# Altium PCB ColorSS_PCB.PcbDoc
Units mm, origin at the board's own origin, x right, y up, seen from the top; angles counter-clockwise.
Board outline 18.5 x 30 mm, 2 copper layers (Top Layer, Bottom Layer), stack 1.571 mm thick; 18 components, 14 nets, 52 pads, 7 vias.
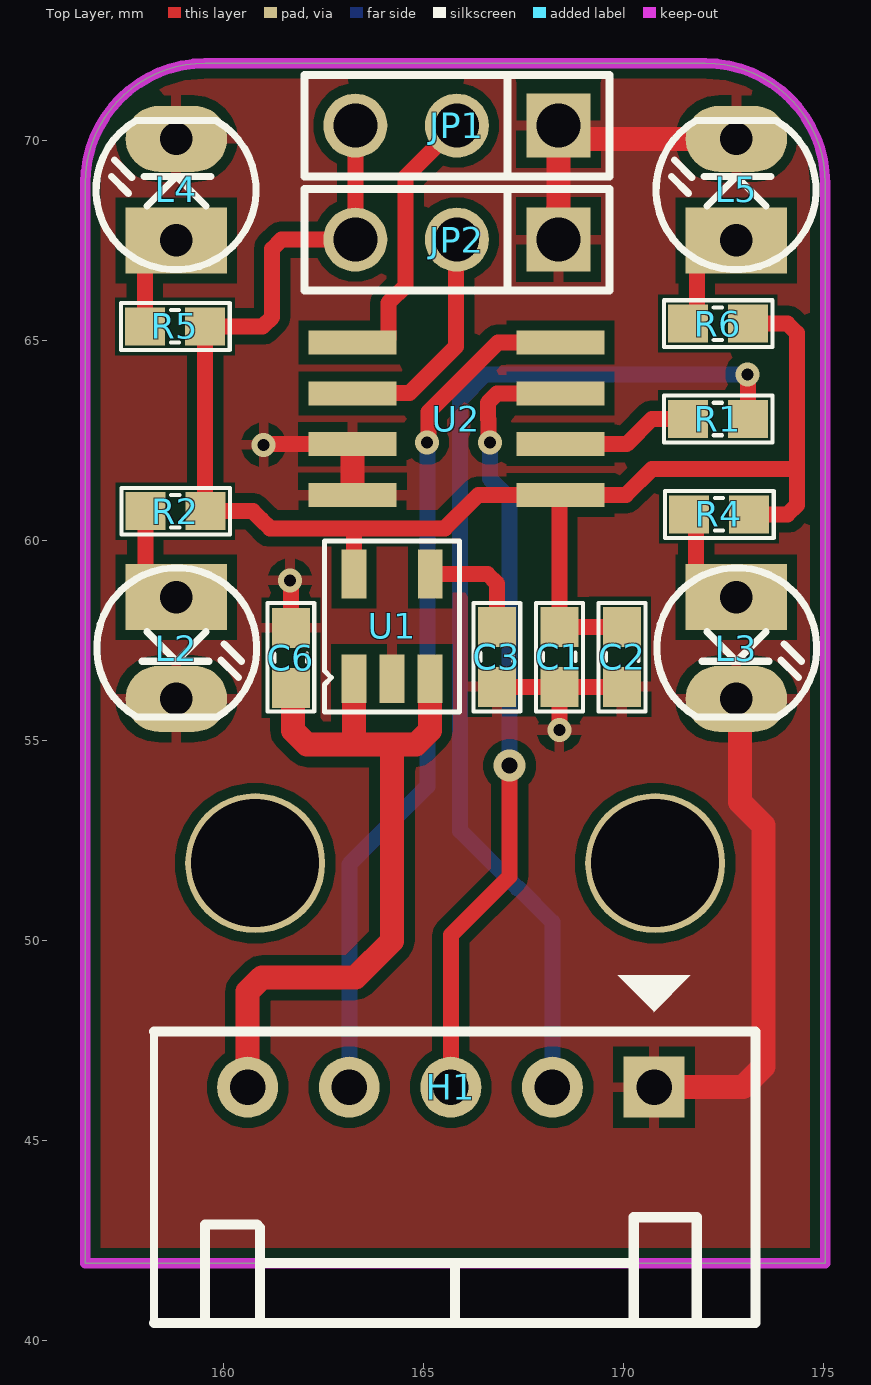
[diagram p0: Top Layer view]
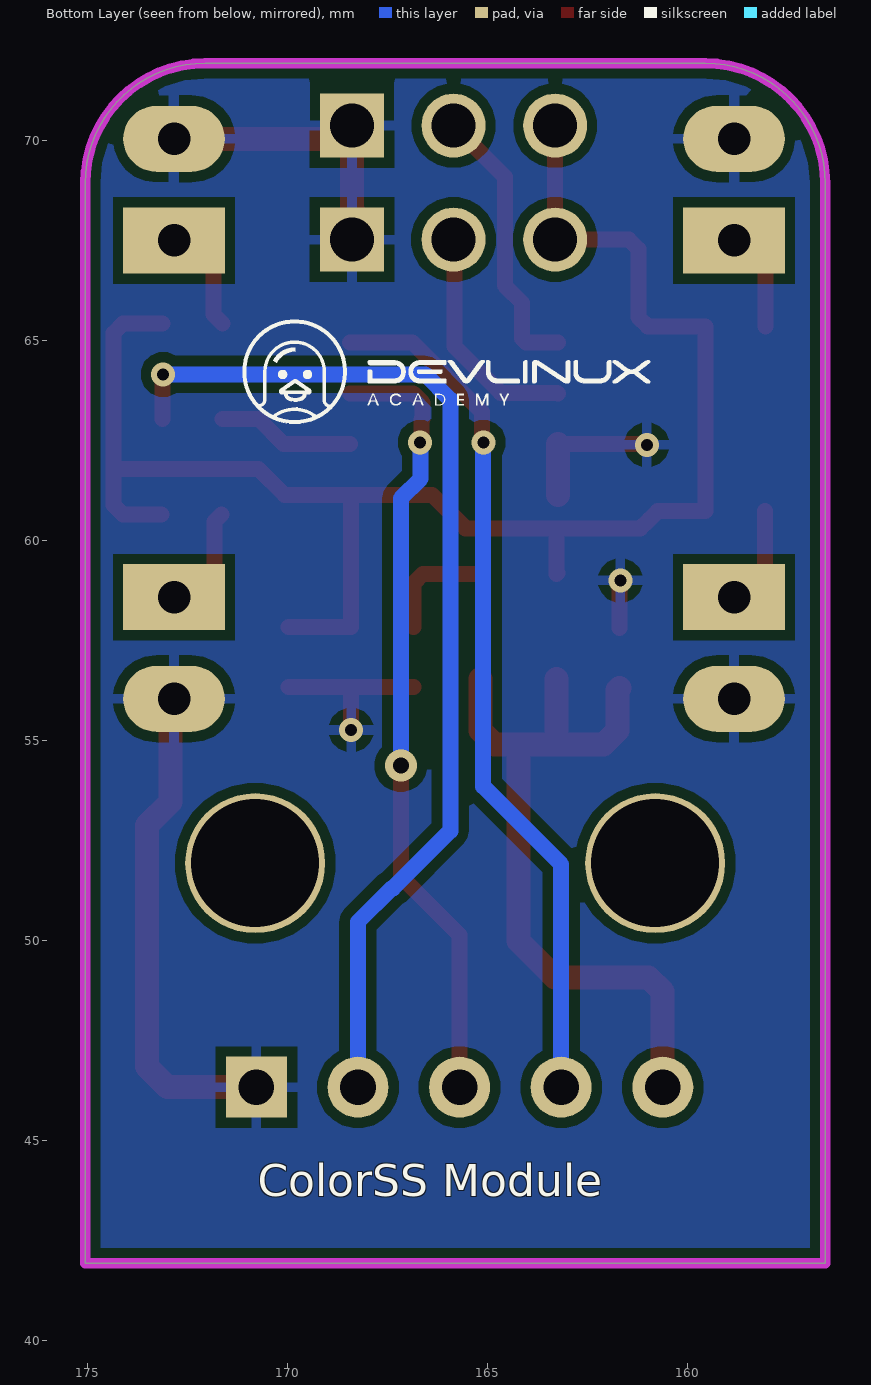
[diagram p1: Bottom Layer view, seen from below]
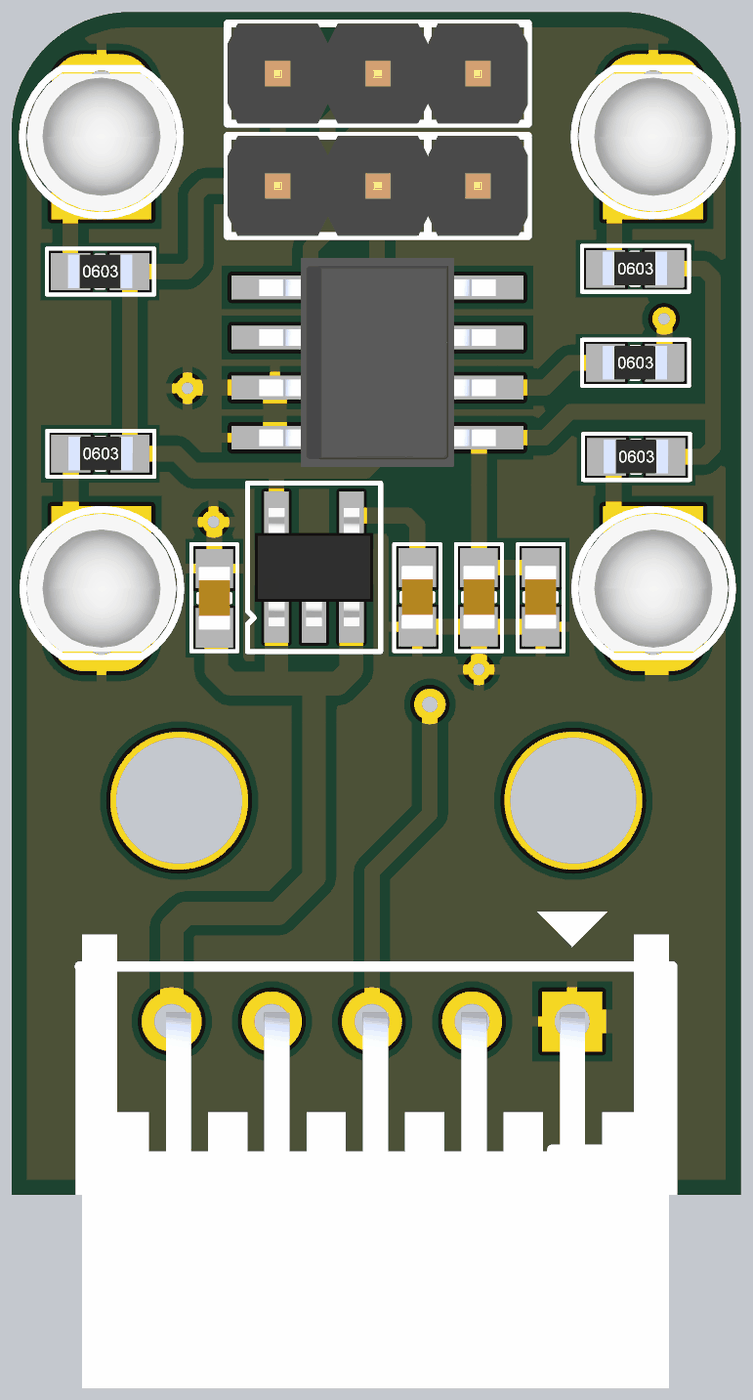
[diagram p2: 3D render of the assembled board from above, using the file's embedded part models]

## Layer stack, top to bottom
Top Solder: solder mask 0.0102, Solder Resist, Dk 3.5
Top Layer: signal copper 0.0356
Dielectric 1: dielectric 1.5, FR-4, Dk 4.8
Bottom Layer: signal copper 0.0356
Bottom Solder: solder mask 0.0102, Solder Resist, Dk 3.5

## Board outline
156.549,41.93 156.549,68.93 cw(c159.549,68.93) 159.549,71.93 172.049,71.93 cw(c172.049,68.93) 175.049,68.93 175.049,41.93

## Design rules (kind name [scope] priority, off if disabled: settings)
Clearance [All] p1: gap=0.254 ignorepadtopadclearanceinfootprint=FALSE except(0: Arc-Hole Track-Hole SMDPad-Hole THPad-Hole Via-Hole Fill-Hole Poly-Hole Region-Hole Text-Hole; 0.178: Arc-Arc Arc-Track Arc-SMDPad Arc-THPad Track-Track Track-SMDPad Track-THPad SMDPad-SMDPad SMDPad-THPad THPad-THPad)
PolygonConnect [All] p1: connectstyle=Relief reliefconductorwidth=0.254 reliefentries=4 polygonreliefangle="90 Angle" airgapwidth=0.254
RoomDefinition ColorSS_SCH [InComponentClass('ColorSS_SCH')] p1: confinementstyle=ConfineIn formatcopy=TRUE lockcomponents=FALSE outline 178.943,26.924 259.715,26.924 259.715,45.085 178.943,45.085
RoutingVias [All] p1: holewidth=0.4 width=0.8 viastyle="Through Hole" minholewidth=0.3 minwidth=0.6 maxholewidth=0.5 maxwidth=1
SolderMaskExpansion [All] p1: expansion=0.102 istentingtop=FALSE
Width [All] p1: maxlimit=0.6 minlimit=0.254 preferedwidth=0.4
30 further rules are at their usual default settings.

## Components (designator, comment, footprint, x,y, rotation, side; value= is the part's Value field where it differs from the comment)
C1 "10uF" "tu 0603" 168.405,57.09 r270 top
C2 "100nF" "tu 0603" 169.97,57.09 r270 top
C3 "22nF" "tu 0603" 166.84,57.09 r270 top
C6 "100nF" "tu 0603" 161.69,57.065 r90 top
H1 "Header 5P 2.54 Duc Cong" "Header 5P DC 2.54" 170.77,46.33 r270 top
JP1 "JP 1x3 2.54" "JP 1x3 DT" 168.38,70.37 r180 top
JP2 "JP 1x3 2.54" "JP 1x3 DT" 168.38,67.52 r180 top
L2 "LED 3mm" LED-3MM-WHITE 158.829,58.58 r270 top
L3 "LED 3mm" LED-3MM-WHITE 172.829,58.58 r270 top
L4 "LED 3mm" LED-3MM-WHITE 158.829,67.5 r90 top
L5 "LED 3mm" LED-3MM-WHITE 172.829,67.5 r90 top
R1 "1k" "tro smd 0603" 172.365,63.035 r0 top
R2 "330R" "tro smd 0603" 158.8,60.73 r0 top
R4 "330R" "tro smd 0603" 172.39,60.65 r0 top
R5 "330R" "tro smd 0603" 158.79,65.35 r0 top
R6 "330R" "tro smd 0603" 172.365,65.42 r0 top
U1 "RT9193-33GB" SOT23-5 164.22,57.85 r0 top
U2 "TCS3200D" SOIC8 165.829,63.04 r0 top

## Footprints (in the part's own frame and the unit in brackets; to place one, negate y for a bottom-side part, rotate by r counter-clockwise, add the part's x,y. Pads: shape width x height; smd on the part's side, far side on the other; paste and mask are expansions set on the pad)
"Header 5P DC 2.54" [mil]
  rect 60x60 hole 35: 1(0,0)
  round 60 hole 35: 2(0,-100) 3(0,-200) 4(0,-300) 5(0,-400)
  silkscreen extent -110,-492 232,100, body extent -87,-490 366,97, height 240
"JP 1x3 DT" [mm]
  rect 1.6x1.6 hole 1.1: 1(0,0)
  round 1.6 hole 1.1: 2(2.54,0) 3(5.08,0)
  silkscreen extent -1.27,-1.27 6.35,1.27, body extent -1.27,-1.27 6.35,1.27, height 8.54
LED-3MM-WHITE [mil] "LED 2 PIN, 3ly Only colour"
  rect 65x100 hole 32: 1(0,0)
  oval 65x100 hole 32: 2(100,0)
  silkscreen extent -29,-78 118,79, body extent -25,-75 113,75, height 217
SOIC8 [mm]
  rect 2.2x0.6 smd: 1(-2.6,1.905) 2(-2.6,0.635) 3(-2.6,-0.635) 4(-2.6,-1.905) 5(2.6,-1.905) 6(2.6,-0.635) 7(2.6,0.635) 8(2.6,1.905)
  body extent -3,-2.65 3,2.65, height 1.75
SOT23-5 [mm] "CASE: SOT"
  rect 0.62x1.22 smd mask+0.076: 1(-0.953,-1.31) 2(-0.003,-1.31) 3(0.947,-1.31) 4(0.952,1.31) 5(-0.953,1.31)
  silkscreen extent -1.69,-2.14 1.69,2.14, body extent -1.5,-1.5 1.5,1.5, height 1.41
"tro smd 0603" [mm] "Chip Capacitor, 2-Leads, Body 1,60x0,80mm, IPC Medium Density"
  rect 1x0.95 smd mask+0.076: 1(-0.75,0) 2(0.75,0)
  silkscreen extent -1.35,-0.58 1.37,0.58, body extent -0.82,-0.42 0.82,0.43, height 0.44
"tu 0603" [mm] "Chip Capacitor, 2-Leads, Body 1,60x0,80mm, IPC Medium Density"
  rect 1x0.95 smd mask+0.076: 1(-0.75,0) 2(0.75,0)
  silkscreen extent -1.35,-0.58 1.37,0.58, body extent -0.8,-0.4 0.8,0.4, height 0.9

## Part data
C1: library part "Tu 0603 106 16V 20%", "Dán", Chung_Loai=Dán, Don_Vi=Con, Ma_Hang=MH004848, So_Chan=2, Ten_Linh_Kien="Tụ 0603-10uF 20% 16V"
C2 C3 C6: library part "Tu 0603 104 50V 10%", "Dán", Chung_Loai=Dán, Don_Vi=Con, Ma_Hang=MH004568, So_Chan=2, Ten_Linh_Kien="Tụ 0603 104-100nF 10% 50V"
H1: "Cắm", Chung_Loai=Cắm, Don_Vi=Con, Ma_Hang=MH001308, Ten_Linh_Kien="Header 5P XH2.54-5P Đực Cong"
JP1 JP2: library part "JP 1x3 2.54 Duc Thang", "Cắm", Chung_Loai=Cắm, Don_Vi=Con, Ma_Hang=MH000903, Ten_Linh_Kien="Jump Đơn Đực 2.54MM 1x40P Thẳng 11MM"
L2 L3 L4 L5: library part "LED 3mm Trang", "Cắm", Chung_Loai=Cắm, Don_Vi=Con, Ma_Hang=MH009001, Ten_Linh_Kien="LED 3MM Trắng SS (1000c)"
R1: library part "Tro 0603 1% 1k", "Dán", Chung_Loai=Dán, Don_Vi=Con, Ma_Hang=MH006334, So_Chan=2, Ten_Linh_Kien="Trở 0603 1% 1k"
R2 R4 R5 R6: library part "Tro 0603 5% 330R", "Dán", Chung_Loai=Dán, Don_Vi=Con, Ma_Hang=MH006910, So_Chan=2, Ten_Linh_Kien="Trở 0603 5% 330R"
U1: library part REG_5.5V-3.3V-0.3A-1W-SOT-23-5, "Linear Voltage Regulator IC 1 Output 300mA SOT-23-5", Alternate Part Number-1=NA, Case/Package=SOT-23-5, Manufacturer="Richtek USA Inc.", Supplier Part Number-1=C15651, Manufacturer Part Number=RT9193-33GB, Supplier-1=LCSC
U2: "Color Sensor - Auto Power Down 8-SOIC (0.154, 3.90mm Width)", Package="SOIC-8 ams", Check_prices=https://www.snapeda.com/parts/TCS3200D/ams/view-part/?ref=eda, MF=ams, MP=TCS3200D, SnapEDA_Link=https://www.snapeda.com/parts/TCS3200D/ams/view-part/?ref=snap

## Free pads (board coordinates)
  round 3.5 hole 3.2: 5(160.799,51.93) 5(170.799,51.93)

## Via types
v1: diameter 0.6, hole 0.3, Top Layer to Bottom Layer, 6 vias
v2: diameter 0.8, hole 0.4, Top Layer to Bottom Layer, 1 vias

## Nets (pads, with @x,y where several pads share a name; then routed paths per layer and width w, separated by ;. In a path a pad name is that pad's centre, name@x,y a point inside that pad or via, vN(x,y) a via of type N, cw(c..) or ccw(c..) an arc to the next point about the centre after c; other vN are vias at no path point)
+3V3: C1.1 C2.1 JP1.3 JP2.3 R2.2 R4.2 R5.2 R6.2 U1.5 U2.5 | length 41.9
  Top Layer w0.4: U1.5@163.24,59.187 U1.5 163.267,60.212 163.355,60.3 ; JP2.3 161.454,67.52 161.22,67.286 161.22,65.584 160.986,65.35 R5.2 159.545,65.345 159.545,60.735 R2.2 160.74,60.73 160.951,60.519 161.17,60.3 163.355,60.3 ; JP2.3@163.3,67.76 JP1.3@163.3,70.83 ; C2.1 C1.1 168.405,61.111 U2.5 ; R6.2 174.106,65.42 174.34,65.186 174.34,61.79 ; R4.2 174.106,60.65 174.34,60.884 174.34,61.79 ; 163.355,60.3 165.54,60.3 166.375,61.135 U2.5 ; U2.5 170.065,61.135 170.72,61.79 174.34,61.79
+5: C6.1 H1.5 U1.1 U1.3 | length 19.2
  Top Layer w0.6: H1.5 160.612,46.332 160.612,48.719 160.963,49.07 163.3,49.07 164.22,49.99 164.22,54.9 ; C6.1 161.74,56.265 161.74,55.251 162.091,54.9 163.267,54.9 ; U1.1 163.267,54.9 ; U1.3 165.167,55.251 164.816,54.9 164.22,54.9 ; 163.267,54.9 164.22,54.9
A_OUT: H1.2 R1.2 | length 26.7
  Top Layer w0.4: v1(173.1,64.15) 173.1,64.06 173.115,64.045 R1.2
  Bottom Layer w0.4: H1.2 168.23,50.46 167.39,51.3 167.36,51.3 165.92,52.74 165.92,63.52 166.55,64.15 v1(173.1,64.15)
GND: C1.2 C2.2 C3.2 C6.2 H1.1 JP1.1 JP2.1 L2.2 L3.2 L4.2 L5.2 U1.2 U2.3 U2.4 | length 27.7
  Top Layer w0.4: v1(161.01,62.39) 161.025,62.405 U2.3 ; v1(161.67,59) 161.69,58.98 C6.2 ; C3.2 C1.2 ; v1(168.4,55.26) 168.405,55.265 C1.2 ; C2.2 C1.2
  Top Layer w0.6: U2.4 U2.3 ; JP2.1@168.36,68.25 168.385,68.275 168.385,70 JP1.1@168.425,70.04 ; JP1.1 168.71,70.04 L5.2 ; H1.1 172.99,46.33 173.51,46.85 173.51,52.87 172.92,53.46 172.92,55.949 L3.2
NetC3_1: C3.1 U1.4 | length 2.9
  Top Layer w0.4: U1.4 166.606,59.16 166.84,58.926 C3.1
NetJP1_2: JP1.2 U2.1 | length 7
  Top Layer w0.4: U2.1 164.029,64.945 164.129,65.045 164.129,65.939 164.56,66.37 164.56,69.09 JP1.2
NetJP2_2: JP2.2 U2.2 | length 5.7
  Top Layer w0.4: U2.2 163.245,63.691 164.661,63.691 165.82,64.85 JP2.2@165.82,67.52
NetL2_1: L2.1 R2.1 | length 2.6
  Top Layer w0.4: R2.1 158.05,59.206 158.675,58.58 L2.1
NetL3_1: L3.1 R4.1 | length 2.8
  Top Layer w0.4: R4.1 171.82,60.47 171.82,59.206 172.445,58.58 L3.1
NetL4_1: L4.1 R5.1 | length 2.6
  Top Layer w0.4: R5.1 158.04,66.875 158.665,67.5 L4.1
NetL5_1: L5.1 R6.1 | length 2.8
  Top Layer w0.4: R6.1 171.84,65.645 171.84,66.875 172.465,67.5 L5.1
NetR1_1: R1.1 U2.6 | length 3.4
  Top Layer w0.4: U2.6 170.086,62.405 170.716,63.035 R1.1
S2: H1.3 U2.7 | length 19.9
  Top Layer w0.4: H1.3 165.69,50.13 167.16,51.6 v2(167.16,54.37) ; v1(166.674,62.45) 166.636,62.488 166.636,63.019 166.614,63.041 166.614,63.441 166.848,63.675 U2.7
  Bottom Layer w0.4: v1(166.674,62.45) 166.664,62.44 166.664,61.546 167.16,61.05 v2(167.16,54.37)
S3: H1.4 U2.8 | length 21.7
  Top Layer w0.4: v1(165.096,62.45) 165.134,62.488 165.134,63.214 166.865,64.945 U2.8
  Bottom Layer w0.4: H1.4 163.15,51.9 165.1,53.85 165.1,62.446 v1(165.096,62.45)

## Polygon pours and split planes (outlines as drawn)
GND on Bottom Layer "GND_L02_P001" (solid, remove dead copper, pour order 1): 152.11,76.08 152.67,75.52 180.56,75.52 180.56,39.19 177.76,36.39 177.55,36.6 150.93,36.6
GND on Top Layer "GND_L01_P000" (solid, remove dead copper, pour order 0): 153.58,74.89 155.6,72.87 179.44,72.87 179.44,37.37 175.87,33.8 173.84,35.83 151.41,35.83 151.69,35.55

## Keep-outs
Keep-Out Layer:
  the board outline again, w0.254

## Silkscreen, mask and mechanical layers (free items; w line width, h text height)
Bottom Overlay:
  drawing of 21 lines, arcs and shapes, not listed
  text "ColorSS Module" at 170.73,43.61 h0.8